# EAGLE board Board (Panelized) (EAGLE 9.6.1)
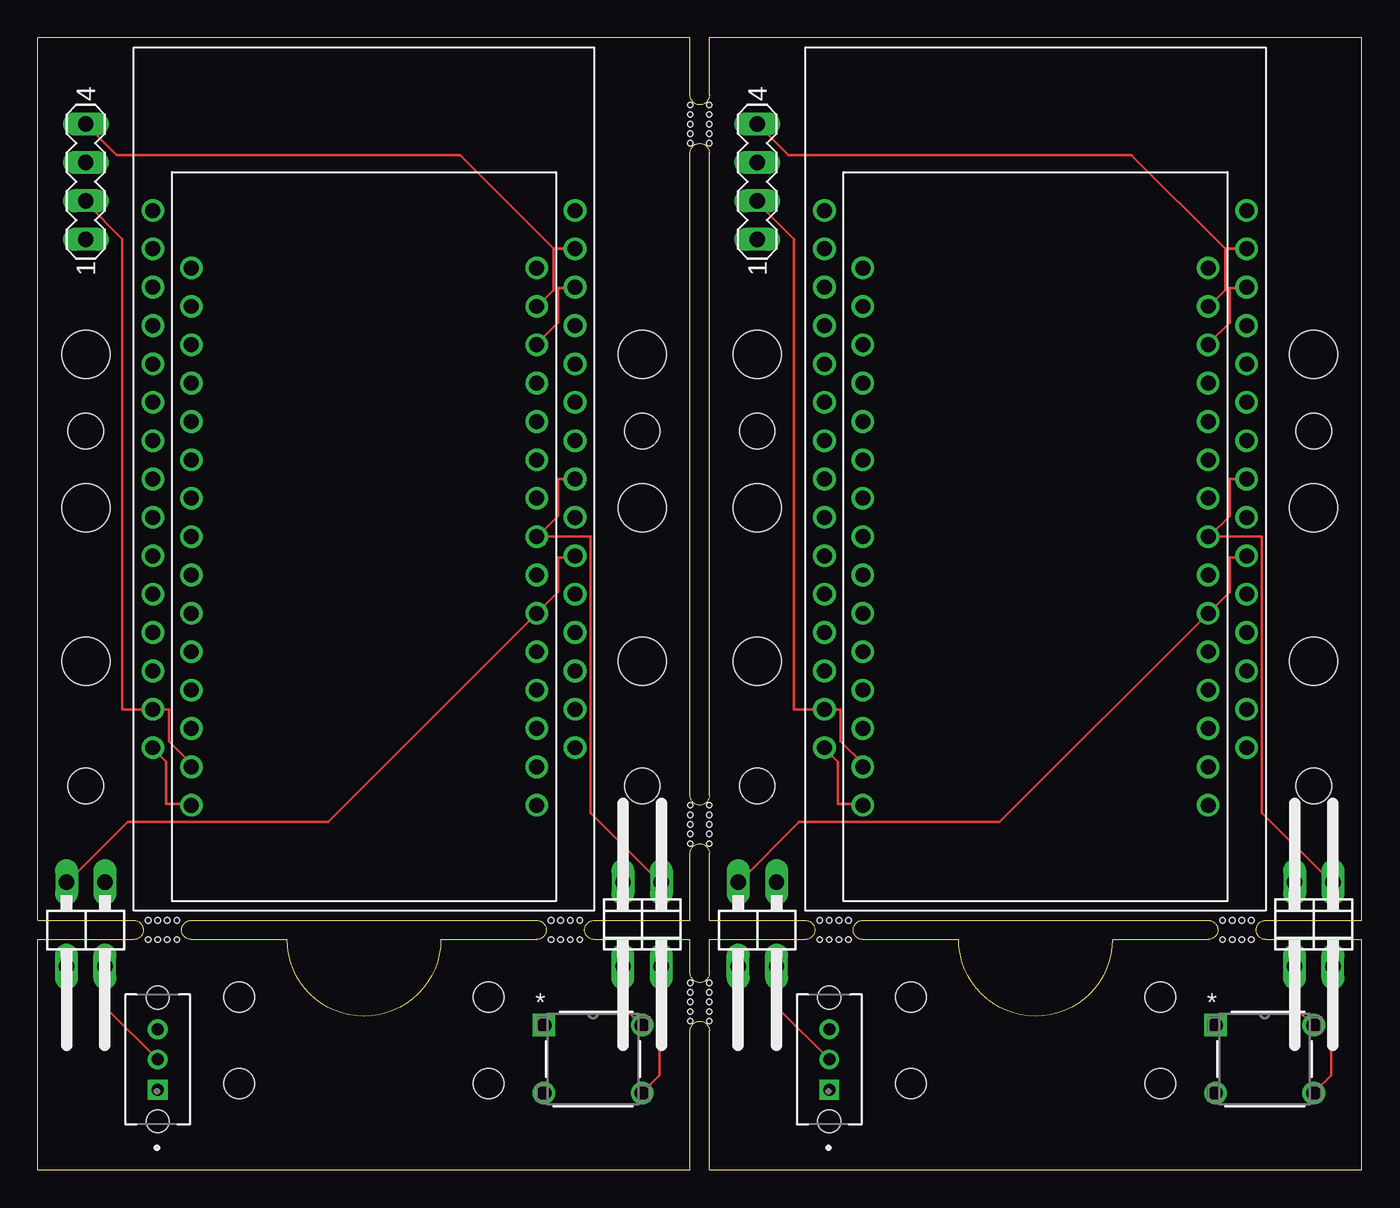
[diagram p0: board, top side]
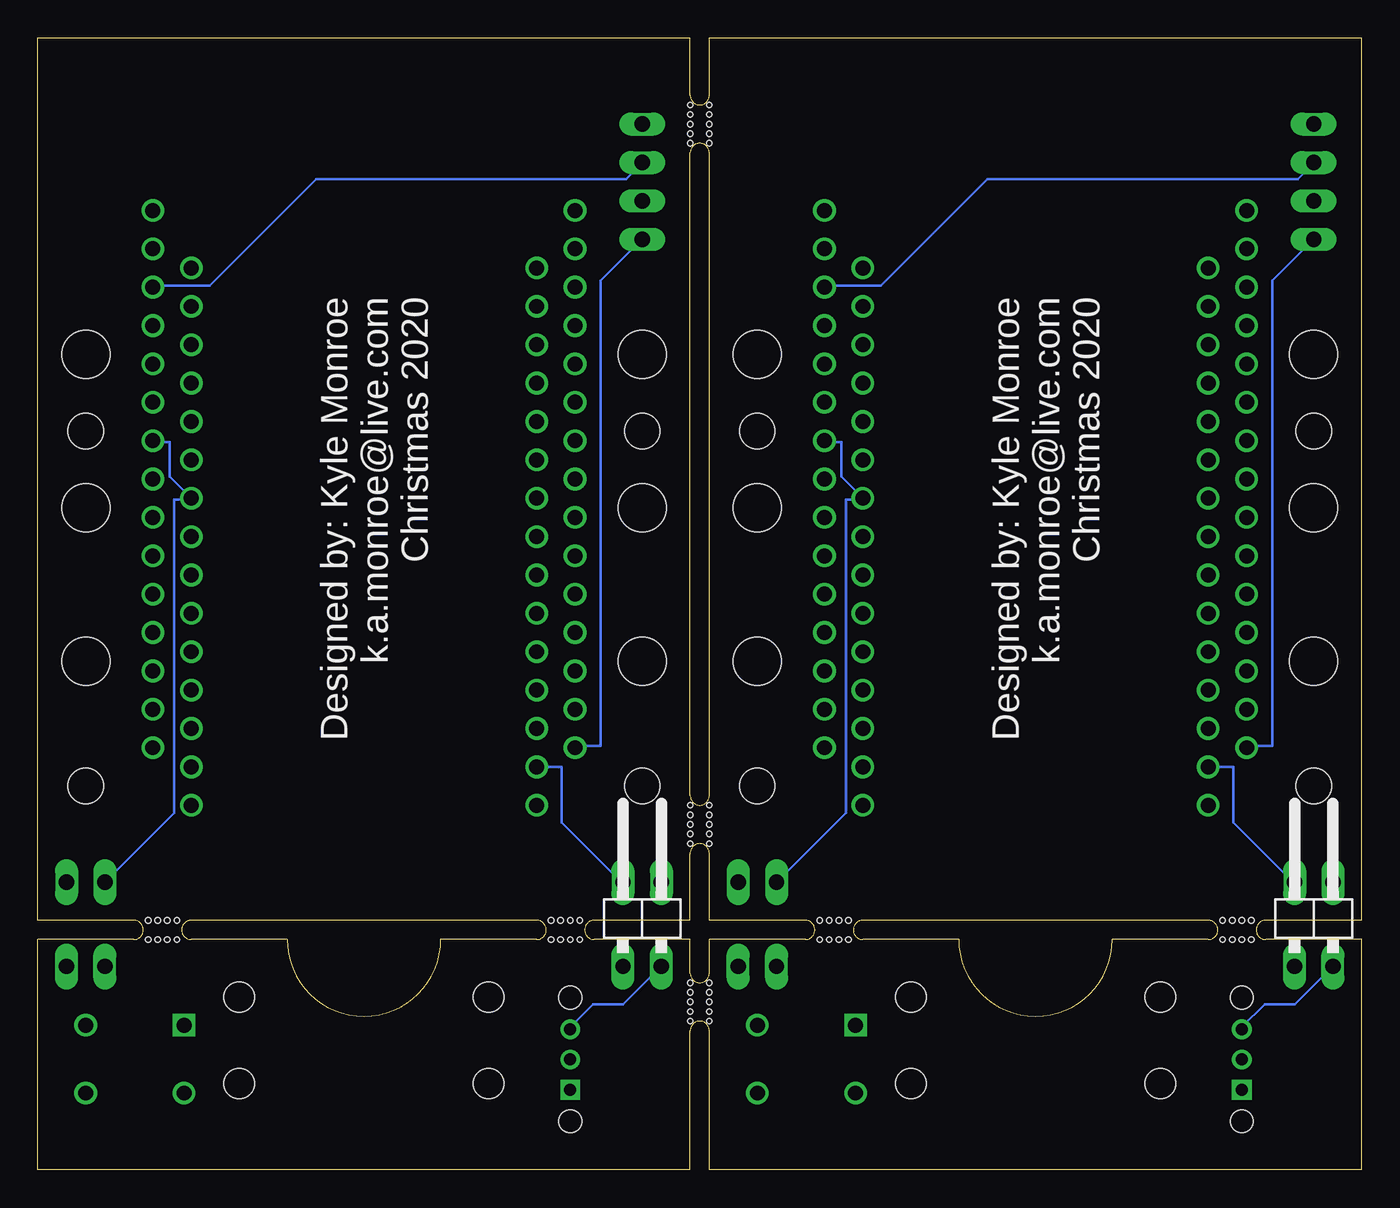
[diagram p1: board, bottom side, seen from below]

Size 87.63 x 74.93 mm. Coordinates in mm from the lower left corner, seen from the top.
Outline: 0,0 43.18,0 43.18,9.21 arc-180 44.45,9.21 44.45,0 87.63,0 87.63,15.24 81.28,15.24 arc-180 81.28,16.51 87.63,16.51 87.63,74.93 44.45,74.93 44.45,71.12 arc-180 43.18,71.12 43.18,74.93 0,74.93 0,16.51 6.35,16.51 arc-180 6.35,15.24 0,15.24 0,0
Outline: 43.18,13.02 43.18,15.24 36.83,15.24 arc-180 36.83,16.51 43.18,16.51 43.18,20.95 arc-180 44.45,20.95 44.45,16.51 50.8,16.51 arc-180 50.8,15.24 44.45,15.24 44.45,13.02 arc-180 43.18,13.02
Outline: 10.16,15.24 16.51,15.24 arc180 26.67,15.24 33.02,15.24 arc180 33.02,16.51 10.16,16.51 arc180 10.16,15.24
Outline: 43.18,24.77 43.18,67.31 arc-180 44.45,67.31 44.45,24.77 arc-180 43.18,24.77
Outline: 54.61,15.24 60.96,15.24 arc180 71.12,15.24 77.47,15.24 arc180 77.47,16.51 54.61,16.51 arc180 54.61,15.24
Copper layers (1*16): Top 0.035mm / dielectric 1.5mm / Bottom 0.035mm
Design rules "DirtyPCB": minimum track width 6mil, minimum drill 12mil, track to track 6mil, track to pad 6mil, pad to pad 6mil, via to via 6mil, smd to smd 0mil, copper to edge 10mil, drill to drill 10mil, minimum pad ring 10mil, minimum via ring 6mil, stop-mask expansion 2mil, vias tented up to drill 25mil, thermal gap 10mil
Holes 2 mm at 13.34,11.43 29.84,11.43 13.34,5.71 29.84,5.71 57.78,11.43 74.3,11.43 57.78,5.71 74.3,5.71
Holes 3.17 mm at 3.17,53.98 3.17,43.81 3.17,33.66 40.01,53.98 40.01,43.81 40.01,33.66 47.62,53.98 47.62,43.81 47.62,33.66 84.45,53.98 84.45,43.81 84.45,33.66
Holes 0.35 mm at 7.3,16.51 7.94,16.51 8.57,16.51 9.21,16.51 7.3,15.24 7.94,15.24 8.57,15.24 9.21,15.24 33.97,16.51 34.61,16.51 35.24,16.51 35.88,16.51 33.97,15.24 34.61,15.24 35.24,15.24 35.88,15.24 51.75,16.51 52.39,16.51 53.02,16.51 53.66,16.51 51.75,15.24 52.39,15.24 53.02,15.24 53.66,15.24 78.42,16.51 79.06,16.51 79.69,16.51 80.33,16.51 78.42,15.24 79.06,15.24 79.69,15.24 80.33,15.24 44.45,70.48 44.45,69.85 44.45,69.22 44.45,68.58 44.45,67.94 43.18,67.94 43.18,68.58 43.18,69.22 43.18,69.85 43.18,70.48 44.45,24.13 44.45,23.5 44.45,22.86 44.45,22.23 44.45,21.59 43.18,21.59 43.18,22.23 43.18,22.86 43.18,23.5 43.18,24.13 44.45,12.38 44.45,11.75 44.45,11.11 44.45,10.48 44.45,9.84 43.18,9.84 43.18,10.48 43.18,11.11 43.18,11.75 43.18,12.38
Holes 2.34 mm at 3.17,48.9 3.17,25.4 40.01,48.9 40.01,25.4 47.62,25.4 47.62,48.9 84.45,48.9 84.45,25.4

## Footprints (pad centres in the part's own frame; a part is rotated, then mirrored left to right if it is on the bottom)
1X02/90 = drill 1.016 long: 1 -1.27,-3.81; 2 1.27,-3.81
SW_OS102011MS2QN1 = drill 0.8 square: 1 -2,0 | drill 0.8: 2 0,0; 3 2,0 | hole 1.5: -4.1,0; 4.1,0
MA04-1 = drill 1.016 long: 1 -3.81,0; 2 -1.27,0; 3 1.27,0; 4 3.81,0
SW4_1825910-B_TEC = drill 0.991 pad 1.499 square: 1 -6.502,4.496 | drill 0.991 pad 1.499: 2 0,4.496; 3 -6.502,0; 4 0,0
ESP-12E(SMALL) = drill 0.991: 3.3V-1 -12.7,-7.62; 3.3V-2 10.16,5.08; 3.3V-3 10.16,-17.78; A0 -12.7,17.78; CS -12.7,2.54; EN -12.7,-10.16; GND1 -12.7,-5.08; GND2 -12.7,-15.24; GND3 10.16,2.54; GND4 10.16,-15.24; GPIO0 10.16,10.16; GPIO1 10.16,-12.7; GPIO2 10.16,7.62; GPIO3 10.16,-10.16; GPIO4 10.16,12.7; GPIO5 10.16,15.24; GPIO9 -12.7,7.62; GPIO10 -12.7,10.16; GPIO12 10.16,-2.54; GPIO13 10.16,-5.08; GPIO14 10.16,0; GPIO15 10.16,-7.62; GPIO16 10.16,17.78; MISO -12.7,0; MOSI -12.7,5.08; NC1 -12.7,15.24; NC2 -12.7,12.7; RST -12.7,-12.7; SCLK -12.7,-2.54; VIN -12.7,-17.78
ESP-12E(LARGE) = drill 0.991: 3.3V-1 -13.97,-7.62; 3.3V-2 13.97,5.08; 3.3V-3 13.97,-17.78; A0 -13.97,17.78; CS -13.97,2.54; EN -13.97,-10.16; GND1 -13.97,-5.08; GND2 -13.97,-15.24; GND3 13.97,2.54; GND4 13.97,-15.24; GPIO0 13.97,10.16; GPIO1 13.97,-12.7; GPIO2 13.97,7.62; GPIO3 13.97,-10.16; GPIO4 13.97,12.7; GPIO5 13.97,15.24; GPIO9 -13.97,7.62; GPIO10 -13.97,10.16; GPIO12 13.97,-2.54; GPIO13 13.97,-5.08; GPIO14 13.97,0; GPIO15 13.97,-7.62; GPIO16 13.97,17.78; MISO -13.97,0; MOSI -13.97,5.08; NC1 -13.97,15.24; NC2 -13.97,12.7; RST -13.97,-12.7; SCLK -13.97,-2.54; VIN -13.97,-17.78

## Placement (x,y rotation side)
JP1  [1X02/90]  40.01,15.24 180 top
JP2  [1X02/90]  40.01,17.27 0 top
JP3  [1X02/90]  3.17,15.24 180 top
JP4  [1X02/90]  3.17,17.27 0 bottom
JP5  [1X02/90]  84.45,15.24 180 top
JP6  [1X02/90]  84.45,17.27 0 top
JP7  [1X02/90]  47.62,15.24 180 top
JP8  [1X02/90]  47.62,17.27 0 bottom
S1  dstSwitch  [SW_OS102011MS2QN1]  7.94,7.3 90 top
S2  dstSwitch  [SW_OS102011MS2QN1]  52.39,7.3 90 top
SV1  [MA04-1]  3.17,65.41 90 top
SV2  [MA04-1]  47.62,65.41 90 top
SW1  configButton  [SW4_1825910-B_TEC]  40.01,5.08 0 top
SW2  configButton  [SW4_1825910-B_TEC]  84.45,5.08 0 top
U$1  ESP-12F(SMALL)  [ESP-12E(SMALL)]  22.86,41.91 0 top
U$2  ESP-12F(LARGE)  [ESP-12E(LARGE)]  21.59,45.72 0 top
U$3  ESP-12F(SMALL)  [ESP-12E(SMALL)]  67.31,41.91 0 top
U$4  ESP-12F(LARGE)  [ESP-12E(LARGE)]  66.04,45.72 0 top

## Library data of the parts
JP1-JP8 = pinhead
S1 S2 = MonroeKyle; DESCRIPTION: SLIDE SWITCH SPDT T/H ON-ON BBM; DIGI-KEY_PART_NUMBER: CKN12284-ND; MF: C&K; MP: OS102011MS2QN1; PACKAGE: None; PURCHASE-URL: https://pricing.snapeda.com/search/part/OS102011MS2QN1/?ref=eda
SV1 SV2 = con-lstb; OC_FARNELL: unknown; OC_NEWARK: unknown
SW1 SW2 = MonroeKyle; BUILT_BY: EMA_UL_Team; CONFIGURATION__POLE-THROW_: Single Pole - Single Throw; COPYRIGHT: Copyright (C) 2016 Accelerated Designs. All rights reserved; DESCRIPTION: FSM4JH=6MM TACT SWITCH, HIGH TEMP; MANUFACTURER_PART_NUMBER: 1825910-6; MAX_SWITCHING_CURRENT: -; MAX_SWITCHING_VOLTAGE_AC_: -; PRODUCT_TYPE: Switch; SOURCELIBRARY: TE_Connectivity-2018-03-16; SWITCH_TYPE: Tactile Switches; TE_PART_NUMBER: 1825910-6; VENDOR: TE Connectivity
U$1-U$4 = MonroeKyle

## Nets
N$1: JP1.1 U$1.GPIO14 U$2.GPIO14
N$2: JP1.2 U$1.GND3 U$2.GND3
N$3: JP7.2 U$3.GPIO13 U$4.GPIO13
N$4: JP7.1 SV2.2 U$3.GND2 U$4.GND2
N$5: JP3.2 U$1.GPIO13 U$2.GPIO13
N$6: SV2.1 U$3.VIN U$4.VIN
N$7: SV2.3 U$3.GPIO4 U$4.GPIO4
N$8: SV2.4 U$3.GPIO5 U$4.GPIO5
N$9: JP8.1 S2.2
N$10: JP8.2 S2.3
N$11: JP6.1 SW2.2
N$12: JP6.2 SW2.4
N$13: U$4.3.3V-3
N$14: JP3.1 SV1.2 U$1.GND2 U$2.GND2
N$15: SV1.1 U$1.VIN U$2.VIN
N$16: JP5.1 U$3.GPIO14 U$4.GPIO14
N$17: JP5.2 U$3.GND3 U$4.GND3
N$28: SV1.3 U$1.GPIO4 U$2.GPIO4
N$29: SV1.4 U$1.GPIO5 U$2.GPIO5
N$31: JP4.1 S1.2
N$32: JP4.2 S1.3
N$33: JP2.1 SW1.2
N$34: JP2.2 SW1.4
N$47: U$2.3.3V-3

## Tracks (layer width: path | path; a pad name or v marks a point on that pad's centre or on a via)
N$1
  Top 0.152: 33.07,41.91 34.44,43.28 34.44,45.72 U$2.GPIO14 | 33.07,41.91 36.58,41.91 36.58,23.62 41.15,19.05 JP1.1 | 33.07,41.91 U$1.GPIO14
N$2
  Bottom 0.152: U$2.GND3 35.51,48.16 34.44,48.16 34.44,45.87 U$1.GND3 33.07,44.35 34.14,44.35 34.14,23.62 38.71,19.05 JP1.2
N$3
  Top 0.152: U$4.GPIO13 79.96,40.54 78.89,40.54 78.89,38.25 U$3.GPIO13 63.65,23.01 50.39,23.01 46.43,19.05 JP7.2
N$4
  Top 0.152: U$3.GND2 54.61,26.89 53.14,28.36 53.14,30.48 U$4.GND2 50.05,30.48 50.05,61.61 47.65,64.01 SV2.2
  Bottom 0.152: U$3.GND2 52.96,26.67 52.96,22.99 49.02,19.05 JP7.1
N$5
  Top 0.152: U$2.GPIO13 35.51,40.54 34.44,40.54 34.44,38.25 U$1.GPIO13 19.2,23.01 5.94,23.01 1.98,19.05 JP3.2
N$6
  Top 0.152: U$4.VIN 52.07,27.89 52.96,27 52.96,24.23 54.51,24.23 U$3.VIN
  Bottom 0.152: SV2.1 50.37,58.85 50.37,28.04 52.07,28.04 U$4.VIN
N$7
  Top 0.152: U$3.GPIO4 77.52,54.71 78.89,56.08 78.89,58.37 79.96,58.37 U$4.GPIO4
  Bottom 0.152: SV2.3 47.65,66.6 48.68,65.57 69.22,65.57 76.26,58.52 79.96,58.52 U$4.GPIO4
N$8
  Top 0.152: 78.59,60.96 78.59,58.22 77.52,57.15 U$3.GPIO5 | U$4.GPIO5 78.59,60.96 | SV2.4 49.68,67.16 72.39,67.16 78.59,60.96
N$9
  Top 0.152: S2.2 49.02,10.67 49.02,13.41 JP8.1
N$10
  Bottom 0.152: S2.3 52.38,9.45 50.88,10.95 48.9,10.95 46.43,13.41 JP8.2
N$11
  Top 0.152: SW2.2 84.38,9.6 83.31,10.67 83.31,13.41 JP6.1
N$12
  Top 0.152: SW2.4 84.53,5.18 85.6,6.25 85.6,13.41 JP6.2
N$14
  Top 0.152: U$1.GND2 10.16,26.89 8.69,28.36 8.69,30.48 U$2.GND2 5.6,30.48 5.6,61.61 3.2,64.01 SV1.2
  Bottom 0.152: U$1.GND2 8.51,26.67 8.51,22.99 4.57,19.05 JP3.1
N$15
  Top 0.152: U$2.VIN 7.62,27.89 8.51,27 8.51,24.23 10.06,24.23 U$1.VIN
  Bottom 0.152: SV1.1 5.92,58.85 5.92,28.04 7.62,28.04 U$2.VIN
N$16
  Top 0.152: 77.52,41.91 78.89,43.28 78.89,45.72 U$4.GPIO14 | 77.52,41.91 81.03,41.91 81.03,23.62 85.6,19.05 JP5.1 | 77.52,41.91 U$3.GPIO14
N$17
  Bottom 0.152: U$4.GND3 79.96,48.16 78.89,48.16 78.89,45.87 U$3.GND3 77.52,44.35 78.59,44.35 78.59,23.62 83.16,19.05 JP5.2
N$28
  Top 0.152: U$1.GPIO4 33.07,54.71 34.44,56.08 34.44,58.37 35.51,58.37 U$2.GPIO4
  Bottom 0.152: SV1.3 3.2,66.6 4.23,65.57 24.77,65.57 31.81,58.52 35.51,58.52 U$2.GPIO4
N$29
  Top 0.152: 34.14,60.96 34.14,58.22 33.07,57.15 U$1.GPIO5 | U$2.GPIO5 34.14,60.96 | SV1.4 5.23,67.16 27.94,67.16 34.14,60.96
N$31
  Top 0.152: S1.2 4.57,10.67 4.57,13.41 JP4.1
N$32
  Bottom 0.152: S1.3 7.92,9.45 6.43,10.95 4.45,10.95 1.98,13.41 JP4.2
N$33
  Top 0.152: SW1.2 39.93,9.6 38.86,10.67 38.86,13.41 JP2.1
N$34
  Top 0.152: SW1.4 40.08,5.18 41.15,6.25 41.15,13.41 JP2.2

## Text on the board
bPlace: Designed by: Kyle Monroe / k.a.monroe@live.com / Christmas 2020 | Designed by: Kyle Monroe / k.a.monroe@live.com / Christmas 2020